# Altium PCB PCB1.PcbDoc
Units mm, origin at the board's own origin, x right, y up, seen from the top; angles counter-clockwise.
Board outline 100.08 x 200.03 mm, 2 copper layers (Top Layer, Bottom Layer); 27 components, 26 nets, 177 pads, 20 vias.
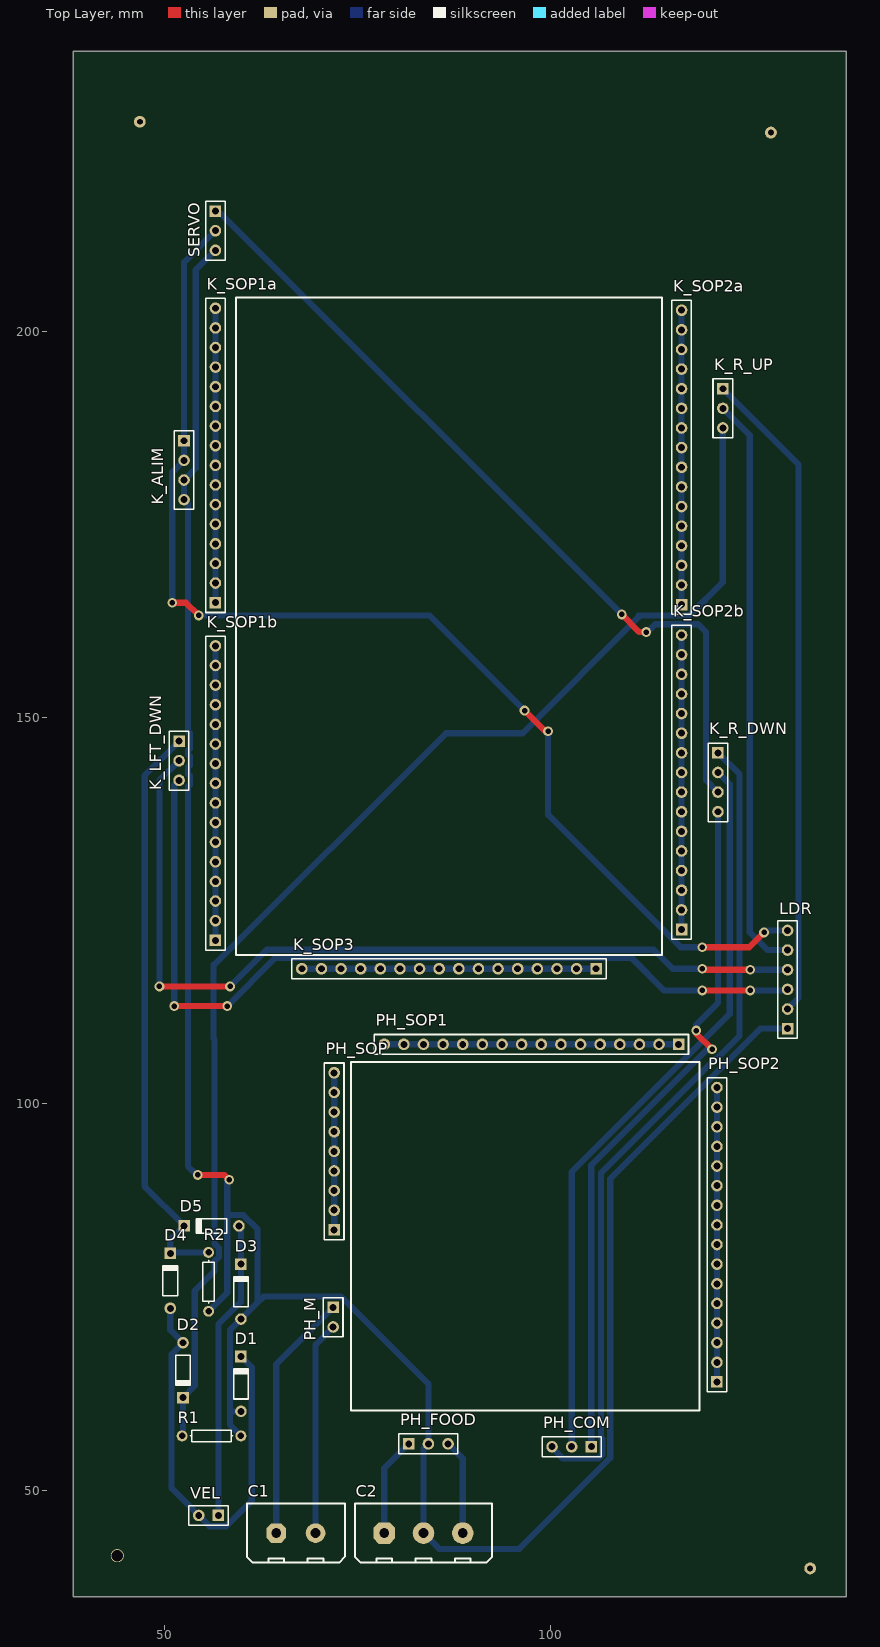
[diagram p0: Top Layer view]
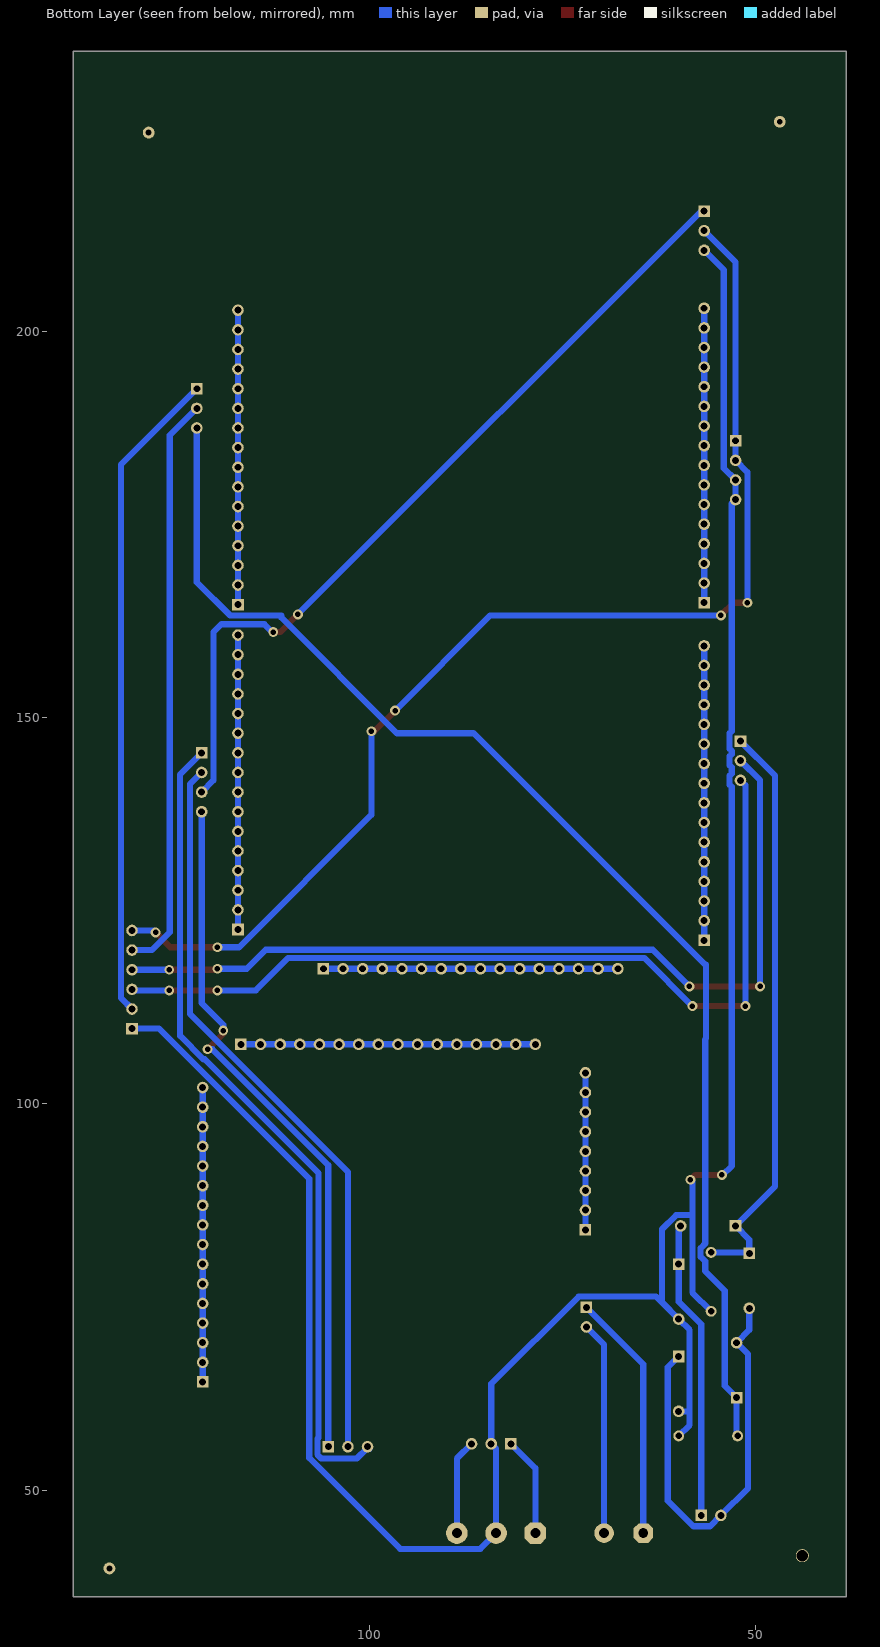
[diagram p1: Bottom Layer view, seen from below]

## Layer stack, top to bottom
Top Layer: signal copper 0.0356
Dielectric: dielectric 0.32, FR-4, Dk 4.8
Bottom Layer: signal copper 0.0356

## Board outline
38.227,236.22 138.303,236.22 138.303,36.195 38.227,36.195 38.227,236.22 138.303,236.22

## Design rules (kind name [scope] priority, off if disabled: settings)
Clearance [All] p1: gap=0.254
PolygonConnect [All] p1: connectstyle=Relief reliefconductorwidth=0.254 reliefentries=4 polygonreliefangle="90 Angle" airgapwidth=0.254
RoutingVias [All] p1: holewidth=0.711 width=1.27 viastyle="Through Hole" minholewidth=0.711 minwidth=1.27 maxholewidth=0.711 maxwidth=1.27
SolderMaskExpansion [All] p1: expansion=0.102
Width [All] p1: maxlimit=0.8 minlimit=0.6 preferedwidth=0.7
28 further rules are at their usual default settings.

## Components (designator, comment, footprint, x,y, rotation, side; value= is the part's Value field where it differs from the comment)
C1 "Conector_2x" Conector_2x 64.516,44.45 r0 top
C2 "Conector_3x" Conector_3x 78.486,44.45 r0 top
D1 "Diode 1N4148" DO-35 59.944,63.754 r90 top
D2 "Diode 1N4148" DO-35 52.451,65.532 r270 top
D3 "Diode 1N4148" DO-35 59.944,75.692 r90 top
D4 "Diode 1N4148" DO-35 50.8,77.089 r90 top
D5 "Diode 1N4148" DO-35 56.134,84.201 r180 top
K_ALIM "Header 4" HDR1X4 52.578,185.801 r270 top
K_LFT_DWN "Header 3" HDR1X3 51.943,146.939 r270 top
K_R_DWN "Header 4" HDR1X4 121.666,145.415 r270 top
K_R_UP "Header 3" HDR1X3 122.301,192.532 r270 top
K_SOP1a "Header 16" HDR1X16 56.642,164.846 r90 top
K_SOP1b "Header 16" HDR1X16 56.642,121.158 r90 top
K_SOP2a "Header 16" HDR1X16 116.967,164.592 r90 top
K_SOP2b "Header 16" HDR1X16 116.967,122.555 r90 top
K_SOP3 "Header 16" HDR1X16 105.918,117.475 r180 top
LDR "Header 6" HDR1X6 130.683,109.728 r90 top
PH_COM "Header 3" HDR1X3 105.283,55.626 r180 top
PH_FOOD "Header 3" HDR1X3 81.661,56.007 r0 top
PH_M "Header 2" HDR1X2 71.882,73.66 r270 top
PH_SOP "Header 9" HDR1X9 72.009,83.693 r90 top
PH_SOP1 "Header 16" HDR1X16 116.586,107.696 r180 top
PH_SOP2 "Header 16" HDR1X16 121.539,64.008 r90 top
R1 "Res1" AXIAL-0.3 56.134,57.023 r180 top
R2 "Res1" AXIAL-0.3 55.753,76.962 r90 top
SERVO "Header 3" HDR1X3 56.642,215.519 r270 top
VEL "Header 2" HDR1X2 57.023,46.736 r180 top

## Footprints (in the part's own frame and the unit in brackets; to place one, negate y for a bottom-side part, rotate by r counter-clockwise, add the part's x,y. Pads: shape width x height; smd on the part's side, far side on the other; paste and mask are expansions set on the pad)
AXIAL-0.3 [mm] "Axial Device, Thru-Hole; 2 Leads; 0.3 in Pin Spacing"
  round 1.4 hole 0.85: 1(-3.81,0) 2(3.81,0)
  silkscreen extent -2.77,-0.76 2.77,0.76
Conector_2x [mm]
  oct 2.54x2.54 / inner round 0 / far side oct 2.54x2.54 hole 1.27: 1(0,0)
  round 2.54 / inner round 0 / far side round 2.54 hole 1.27: 2(5.08,0)
  silkscreen extent -3.81,-3.81 8.89,3.81
Conector_3x [mil]
  oct 110x110 / inner round 0 / far side oct 110x110 hole 50: 1(0,0)
  round 110 / inner round 0 / far side round 110 hole 50: 2(400,0) C(200,0)
  silkscreen extent -150,-150 550,150
DO-35 [mm] "Diode, Axial; Body 3.8 x 1.9 mm (LxDia. max), Lead Dia. 0.53 mm (max)"
  round 1.5 hole 0.9: 1(-3.55,0)
  rect 1.5x1.5 hole 0.9: 2(3.55,0)
  silkscreen extent -1.95,-0.95 2.05,0.95
HDR1X2 [mm] "Connector; Header; 2 Position"
  rect 1.5x1.5 hole 0.9: 1(0,0)
  round 1.5 hole 0.9: 2(2.54,0)
  silkscreen extent -1.27,-1.27 3.81,1.27
HDR1X3 [mm] "Connector; Header; 3 Position"
  rect 1.5x1.5 hole 0.9: 1(0,0)
  round 1.5 hole 0.9: 2(2.54,0) 3(5.08,0)
  silkscreen extent -1.27,-1.27 6.35,1.27
HDR1X4 [mm] "Connector; Header; 4 Position"
  rect 1.5x1.5 hole 0.9: 1(0,0)
  round 1.5 hole 0.9: 2(2.54,0) 3(5.08,0) 4(7.62,0)
  silkscreen extent -1.27,-1.27 8.89,1.27
HDR1X6 [mm] "Connector; Header; 6 Position"
  rect 1.5x1.5 hole 0.9: 1(0,0)
  round 1.5 hole 0.9: 2(2.54,0) 3(5.08,0) 4(7.62,0) 5(10.16,0) 6(12.7,0)
  silkscreen extent -1.27,-1.27 13.97,1.27
HDR1X9 [mm] "Connector; Header; 9 Position"
  rect 1.5x1.5 hole 0.9: 1(0,0)
  round 1.5 hole 0.9: 2(2.54,0) 3(5.08,0) 4(7.62,0) 5(10.16,0) 6(12.7,0) 7(15.24,0) 8(17.78,0) 9(20.32,0)
  silkscreen extent -1.27,-1.27 21.59,1.27
HDR1X16 [mm] "Connector; Header; 16 Position"
  rect 1.5x1.5 hole 0.9: 1(0,0)
  round 1.5 hole 0.9: 2(2.54,0) 3(5.08,0) 4(7.62,0) 5(10.16,0) 6(12.7,0) 7(15.24,0) 8(17.78,0) 9(20.32,0) 10(22.86,0) 11(25.4,0) 12(27.94,0) 13(30.48,0) 14(33.02,0) 15(35.56,0) 16(38.1,0)
  silkscreen extent -1.27,-1.27 39.37,1.27

## Part data
D1 D2 D3 D4 D5: "High Conductance Fast Diode"
K_ALIM K_R_DWN: "Header, 4-Pin"
K_LFT_DWN K_R_UP PH_COM PH_FOOD SERVO: "Header, 3-Pin"
K_SOP1a K_SOP1b K_SOP2a K_SOP2b K_SOP3 PH_SOP1 PH_SOP2: "Header, 16-Pin"
LDR: "Header, 6-Pin"
PH_M VEL: "Header, 2-Pin"
PH_SOP: "Header, 9-Pin"
R1 R2: "Resistor"

## Free pads (board coordinates)
  round 1.7 hole 1.5: 0(43.942,41.529)
  round 1.524 hole 0.762: 1(133.604,39.878) 2(128.524,225.679) 3(46.863,227.076)

## Via types
v1: diameter 1.27, hole 0.711, Top Layer to Bottom Layer, 20 vias

## Nets (pads, with @x,y where several pads share a name; then routed paths per layer and width w, separated by ;. In a path a pad name is that pad's centre, name@x,y a point inside that pad or via, vN(x,y) a via of type N, cw(c..) or ccw(c..) an arc to the next point about the centre after c; other vN are vias at no path point)
3V3: K_ALIM.1 K_ALIM.2 LDR.6 SERVO.2 | length 155.8
  Top Layer w0.8: v1(51.054,164.846) 52.832,164.846 v1(54.483,163.195) ; v1(96.647,150.876) 99.314,148.209 v1(99.695,148.209) ; v1(119.634,120.269) 125.73,120.269 v1(127.635,122.174)
  Bottom Layer w0.8: v1(51.054,164.846) 51.054,181.737 K_ALIM.2 K_ALIM.1 52.578,208.915 SERVO.2 ; v1(54.483,163.195) 84.328,163.195 v1(96.647,150.876) ; v1(99.695,148.209) 99.695,137.402 116.828,120.269 v1(119.634,120.269) ; v1(127.635,122.174) 127.889,122.428 LDR.6
5V: C2.2 PH_FOOD.3 | length 12.3
  Bottom Layer w0.8: PH_FOOD.3 88.646,54.102 C2.2
12V: C2.1 PH_FOOD.1 | length 12.9
  Bottom Layer w0.8: C2.1 78.486,52.832 PH_FOOD.1
ENABLE: K_R_DWN.4 PH_COM.1 | length 91
  Top Layer w0.8: v1(118.872,109.474) 118.872,109.093 v1(120.904,107.061)
  Bottom Layer w0.8: PH_COM.1 105.283,92.075 120.269,107.061 v1(120.904,107.061) ; v1(118.872,109.474) 118.872,110.236 121.666,113.03 K_R_DWN.4
GND: C2.C D1.1 D3.1 K_ALIM.3 K_ALIM.4 LDR.1 PH_FOOD.2 R1.1 R2.1 SERVO.3 | length 323.9
  Top Layer w0.8: v1(54.356,90.805) 57.785,90.805 v1(58.42,90.17)
  Bottom Layer w0.8: v1(54.356,90.805) 54.229,90.805 53.086,91.948 53.086,141.016 53.347,141.277 53.347,142.441 53.086,142.702 53.086,143.556 53.347,143.817 53.347,144.981 53.086,145.242 53.086,145.657 53.347,145.918 53.347,147.96 53.086,148.221 53.086,177.673 K_ALIM.4 K_ALIM.3 54.102,182.245 54.102,207.899 SERVO.3 ; R2.1 58.166,75.565 58.166,85.598 58.173,85.605 ; v1(58.42,90.17) 58.173,89.923 58.173,85.605 ; R1.1 58.54,58.427 58.54,60.325 ; D1.1 58.661,60.204 58.54,60.325 ; LDR.1 127.173,109.728 107.741,90.296 107.741,54.169 95.971,42.399 85.617,42.399 C2.C 83.566,55.372 PH_FOOD.2 84.201,63.766 72.903,75.064 62.866,75.064 62.1,74.298 ; 58.173,85.605 60.266,85.605 62.1,83.771 62.1,74.298 ; 58.54,60.325 58.54,70.738 D3.1 62.1,74.298
IN1: K_R_DWN.2 PH_COM.2 | length 96.3
  Bottom Layer w0.8: PH_COM.2 102.743,91.186 123.19,111.633 123.19,141.351 K_R_DWN.2
IN2: K_R_DWN.1 PH_COM.3 | length 107.4
  Bottom Layer w0.8: PH_COM.3 99.949,55.372 100.33,55.372 101.6,54.102 106.184,54.102 106.687,54.605 106.687,56.647 106.553,56.781 106.553,91.059 121.266,105.772 121.438,105.772 124.46,108.794 124.46,142.621 K_R_DWN.1
LDR0: K_R_UP.2 LDR.5 | length 75.1
  Bottom Layer w0.8: K_R_UP.2 125.79,186.503 125.79,122.196 128.098,119.888 LDR.5
LDR1: K_LFT_DWN.2 LDR.4 | length 114.6
  Top Layer w0.8: v1(49.403,115.189) v1(58.547,115.189) ; v1(119.634,117.475) 119.761,117.348 v1(125.857,117.348)
  Bottom Layer w0.8: v1(49.403,115.189) 49.403,141.859 K_LFT_DWN.2 ; v1(58.547,115.189) 63.291,119.933 113.366,119.933 115.824,117.475 v1(119.634,117.475) ; v1(125.857,117.348) LDR.4
LDR2: K_LFT_DWN.3 LDR.3 | length 113.2
  Top Layer w0.8: v1(51.308,112.649) v1(58.166,112.649) ; v1(119.634,114.681) v1(125.857,114.681)
  Bottom Layer w0.8: v1(51.308,112.649) 51.308,141.224 K_LFT_DWN.3 ; v1(58.166,112.649) 64.396,118.879 110.483,118.879 114.681,114.681 v1(119.634,114.681) ; v1(125.857,114.681) 130.556,114.681 LDR.3
LDR3: K_R_UP.1 LDR.2 | length 84.9
  Bottom Layer w0.8: K_R_UP.1 132.087,182.746 132.087,113.672 LDR.2
M1: C1.1 PH_M.1 | length 32.3
  Bottom Layer w0.8: C1.1 64.516,66.294 PH_M.1
M2: C1.2 PH_M.2 | length 27.6
  Bottom Layer w0.8: C1.2 69.596,68.834 PH_M.2
NetK_SOP1a_1: K_SOP1a.1 K_SOP1a.2 K_SOP1a.3 K_SOP1a.4 K_SOP1a.5 K_SOP1a.6 K_SOP1a.7 K_SOP1a.8 K_SOP1a.9 K_SOP1a.10 K_SOP1a.11 K_SOP1a.12 K_SOP1a.13 K_SOP1a.14 K_SOP1a.15 K_SOP1a.16 | length 38.1
  Bottom Layer w0.8: K_SOP1a.1 K_SOP1a.2 K_SOP1a.3 K_SOP1a.4 K_SOP1a.5 K_SOP1a.6 K_SOP1a.7 K_SOP1a.8 K_SOP1a.9 K_SOP1a.10 K_SOP1a.11 K_SOP1a.12 K_SOP1a.13 K_SOP1a.14 K_SOP1a.15 K_SOP1a.16
NetK_SOP1b_1: K_SOP1b.1 K_SOP1b.2 K_SOP1b.3 K_SOP1b.4 K_SOP1b.5 K_SOP1b.6 K_SOP1b.7 K_SOP1b.8 K_SOP1b.9 K_SOP1b.10 K_SOP1b.11 K_SOP1b.12 K_SOP1b.13 K_SOP1b.14 K_SOP1b.15 K_SOP1b.16 | length 38.1
  Bottom Layer w0.8: K_SOP1b.1 K_SOP1b.2 K_SOP1b.3 K_SOP1b.4 K_SOP1b.5 K_SOP1b.6 K_SOP1b.7 K_SOP1b.8 K_SOP1b.9 K_SOP1b.10 K_SOP1b.11 K_SOP1b.12 K_SOP1b.13 K_SOP1b.14 K_SOP1b.15 K_SOP1b.16
NetK_SOP2a_1: K_SOP2a.1 K_SOP2a.2 K_SOP2a.3 K_SOP2a.4 K_SOP2a.5 K_SOP2a.6 K_SOP2a.7 K_SOP2a.8 K_SOP2a.9 K_SOP2a.10 K_SOP2a.11 K_SOP2a.12 K_SOP2a.13 K_SOP2a.14 K_SOP2a.15 K_SOP2a.16 | length 38.1
  Bottom Layer w0.8: K_SOP2a.1 K_SOP2a.2 K_SOP2a.3 K_SOP2a.4 K_SOP2a.5 K_SOP2a.6 K_SOP2a.7 K_SOP2a.8 K_SOP2a.9 K_SOP2a.10 K_SOP2a.11 K_SOP2a.12 K_SOP2a.13 K_SOP2a.14 K_SOP2a.15 K_SOP2a.16
NetK_SOP2b_1: K_SOP2b.1 K_SOP2b.2 K_SOP2b.3 K_SOP2b.4 K_SOP2b.5 K_SOP2b.6 K_SOP2b.7 K_SOP2b.8 K_SOP2b.9 K_SOP2b.10 K_SOP2b.11 K_SOP2b.12 K_SOP2b.13 K_SOP2b.14 K_SOP2b.15 K_SOP2b.16 | length 38.1
  Bottom Layer w0.8: K_SOP2b.1 K_SOP2b.2 K_SOP2b.3 K_SOP2b.4 K_SOP2b.5 K_SOP2b.6 K_SOP2b.7 K_SOP2b.8 K_SOP2b.9 K_SOP2b.10 K_SOP2b.11 K_SOP2b.12 K_SOP2b.13 K_SOP2b.14 K_SOP2b.15 K_SOP2b.16
NetK_SOP3_1: K_SOP3.1 K_SOP3.2 K_SOP3.3 K_SOP3.4 K_SOP3.5 K_SOP3.6 K_SOP3.7 K_SOP3.8 K_SOP3.9 K_SOP3.10 K_SOP3.11 K_SOP3.12 K_SOP3.13 K_SOP3.14 K_SOP3.15 K_SOP3.16 | length 38.1
  Bottom Layer w0.8: K_SOP3.16 K_SOP3.15 K_SOP3.14 K_SOP3.13 K_SOP3.12 K_SOP3.11 K_SOP3.10 K_SOP3.9 K_SOP3.8 K_SOP3.7 K_SOP3.6 K_SOP3.5 K_SOP3.4 K_SOP3.3 K_SOP3.2 K_SOP3.1
NetPH_SOP1_1: PH_SOP1.1 PH_SOP1.2 PH_SOP1.3 PH_SOP1.4 PH_SOP1.5 PH_SOP1.6 PH_SOP1.7 PH_SOP1.8 PH_SOP1.9 PH_SOP1.10 PH_SOP1.11 PH_SOP1.12 PH_SOP1.13 PH_SOP1.14 PH_SOP1.15 PH_SOP1.16 | length 38.1
  Bottom Layer w0.8: PH_SOP1.16 PH_SOP1.15 PH_SOP1.14 PH_SOP1.13 PH_SOP1.12 PH_SOP1.11 PH_SOP1.10 PH_SOP1.9 PH_SOP1.8 PH_SOP1.7 PH_SOP1.6 PH_SOP1.5 PH_SOP1.4 PH_SOP1.3 PH_SOP1.2 PH_SOP1.1
NetPH_SOP2_1: PH_SOP2.1 PH_SOP2.2 PH_SOP2.3 PH_SOP2.4 PH_SOP2.5 PH_SOP2.6 PH_SOP2.7 PH_SOP2.8 PH_SOP2.9 PH_SOP2.10 PH_SOP2.11 PH_SOP2.12 PH_SOP2.13 PH_SOP2.14 PH_SOP2.15 PH_SOP2.16 | length 38.1
  Bottom Layer w0.8: PH_SOP2.1 PH_SOP2.2 PH_SOP2.3 PH_SOP2.4 PH_SOP2.5 PH_SOP2.6 PH_SOP2.7 PH_SOP2.8 PH_SOP2.9 PH_SOP2.10 PH_SOP2.11 PH_SOP2.12 PH_SOP2.13 PH_SOP2.14 PH_SOP2.15 PH_SOP2.16
NetPH_SOP_1: PH_SOP.1 PH_SOP.2 PH_SOP.3 PH_SOP.4 PH_SOP.5 PH_SOP.6 PH_SOP.7 PH_SOP.8 PH_SOP.9 | length 20.3
  Bottom Layer w0.8: PH_SOP.1 PH_SOP.2 PH_SOP.3 PH_SOP.4 PH_SOP.5 PH_SOP.6 PH_SOP.7 PH_SOP.8 PH_SOP.9
SERVOPWM: K_R_DWN.3 SERVO.1 | length 108.2
  Top Layer w0.8: v1(109.22,163.322) 111.506,161.036 v1(112.395,161.036)
  Bottom Layer w0.8: SERVO.1 57.023,215.519 v1(109.22,163.322) ; v1(112.395,161.036) 112.522,161.036 113.545,162.059 119.119,162.059 120.142,161.036 120.142,141.859 K_R_DWN.3
VNEG: D3.2 D5.1 VEL.1 | length 38.8
  Bottom Layer w0.8: VEL.1 57.023,71.468 59.944,74.389 D3.2 59.944,83.941 D5.1
VNEG_OUT: D4.2 D5.2 K_LFT_DWN.1 R2.2 | length 76
  Bottom Layer w0.8: K_LFT_DWN.1 47.498,142.494 47.498,89.287 D5.2 50.8,82.417 D4.2 50.933,80.772 R2.2
VPOS: D1.2 D2.1 D4.1 VEL.2 | length 57.6
  Bottom Layer w0.8: D4.1 50.8,70.733 D2.1 50.97,67.601 50.97,50.249 VEL.2 55.887,45.332 58.044,45.332 61.348,48.636 61.348,65.9 D1.2
VPOS_OUT: D2.2 K_R_UP.3 R1.2 | length 169.8
  Bottom Layer w0.8: R1.2 52.451,57.15 D2.2 53.975,63.506 53.975,75.819 56.515,78.359 56.515,79.619 57.107,80.211 57.107,81.333 56.515,81.925 56.515,108.331 56.388,108.458 56.388,117.983 56.515,117.983 86.487,147.955 96.393,147.955 111.379,162.941 111.379,163.195 115.939,163.195 115.946,163.188 117.988,163.188 122.301,167.501 K_R_UP.3

## Silkscreen, mask and mechanical layers (free items; w line width, h text height)
Top Overlay:
  lines w0.254: 59.309,119.253 59.309,204.343 114.427,204.343 114.427,119.253 59.309,119.253 ; 74.168,60.325 119.253,60.325 119.253,105.41 74.168,105.41 74.168,60.325